# Altium PCB A13-OLinuXino-MICRO_Rev_B_saved.PcbDoc (part 4 of 4)
Units mil, origin at the board's own origin, x right, y up, seen from the top; angles counter-clockwise.
Board outline 3950 x 3350 mil, 4 copper layers (Top, Route2, Route15, Bottom), stack 64.567 mil thick; 262 components, 264 nets, 1099 pads, 476 vias.
Unrouted connection lines stored in the file: 19.
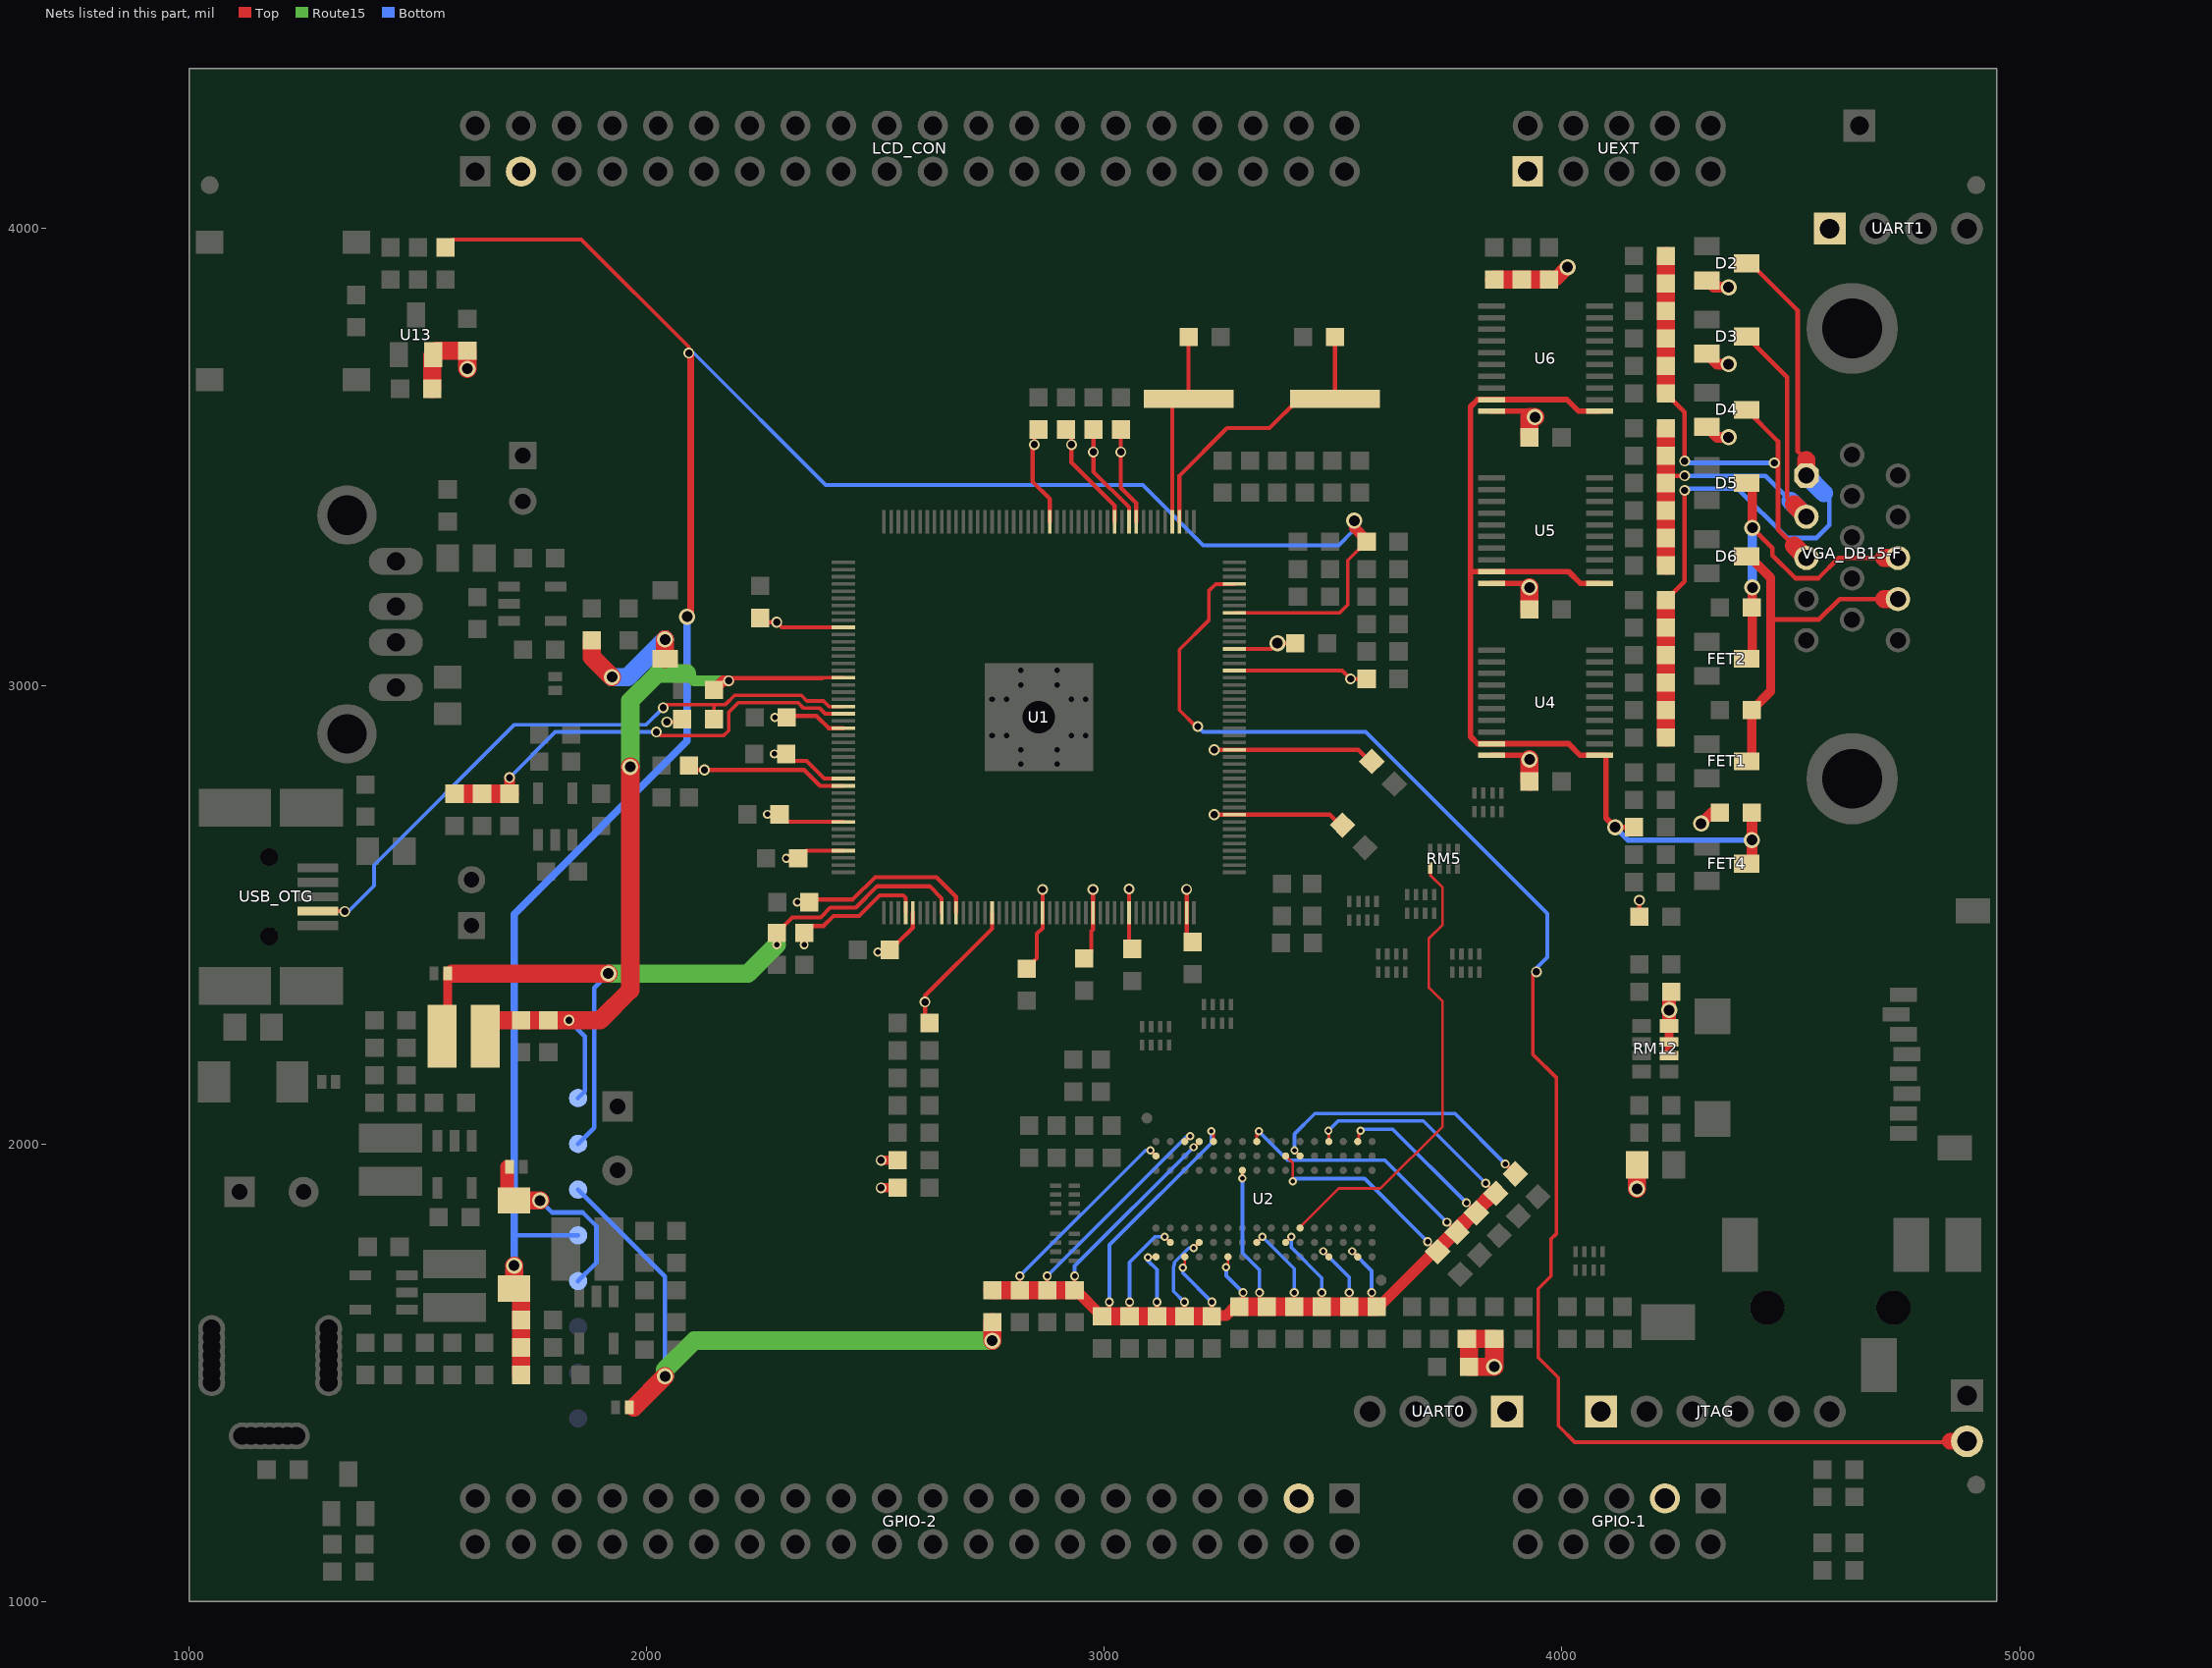
[diagram p6: the nets of this part, all layers, seen from the top]

## Via types
v1: diameter 23.75/23.75/23.75/23.75 (per signal layer), hole 15.75, Top to Bottom, 263 vias
v2: diameter 35.43/31.62/31.62/35.43 (per signal layer), hole 23.62, Top to Bottom, 120 vias
v3: diameter 19.81/19.81/19.81/19.81 (per signal layer), hole 11.81, Top to Bottom, 48 vias
v4: diameter 18/18/18/18 (per signal layer), hole 10, Top to Bottom, 41 vias
v5: diameter 169.92/137.92/137.92/169.92 (per signal layer), hole 129.92, Top to Bottom, 4 vias

## Nets (pads, with @x,y where several pads share a name; then routed paths per layer and width w, separated by ;. In a path a pad name is that pad's centre, name@x,y a point inside that pad or via, vN(x,y) a via of type N, cw(c..) or ccw(c..) an arc to the next point about the centre after c; other vN are vias at no path point) (continued)
USB0-IDDET: R2.2 U1.153 USB_OTG.ID | length 1412.5
  Top w8: USB_OTG.ID@1281.54,2508.5 1339.5,2508.5 v1(1340,2508) ; v1(2036,2953) 2043,2960 2147,2960 ; R2.2@2147,2928 2147,2960 ; U1.153@2429.83,2955.62 2398.38,2955.62 2386,2968 2349.7,2968 2337.7,2980 2192,2980 2172,2960 2147,2960
  Bottom w8: v1(1340,2508) 1348,2508 1404,2564 1404,2609 1711,2916 1999,2916 v1(2036,2953)
USB0-VBUSDET: C87.1 R57.1 R58.2 U1.154 | length 992.8
  Top w8: v1(2021,2900) 2029,2892 2168,2892 2179,2903 2179,2943 2200,2964 2331,2964 2343,2952 2378,2952 2390.13,2939.87 U1.154@2429.83,2939.87
  Top w24: R57.1@1700,2765 v1(1700,2800)
  Top w40: C87.1@1580,2765 R58.2@1640,2765 R57.1@1700,2765
  Bottom w8: v1(1700,2800) 1800,2900 v1(2021,2900)
V+: 1.5V_E.2 C10.2 C11.2 C12.2 C13.2 C14.2 C42.1 C56.1 C61.2 P5.1 R1.1 R7.2 R9.2 U1.23 U1.30 U1.43 U1.53 U1.62 | length 2808.5
  Top w8: C56.1@3792,1574 C56.1@3797,1574
  Top w9: C10.2@2830,2383 2852.5,2405.5 2852.5,2459 2864.87,2471.37 U1.23@2864.87,2504.83 v1(2864.87,2555.87) ; C11.2@2956,2405 2971.5,2420.5 2971.5,2465 2975.11,2468.61 U1.30@2975.11,2504.83 v1(2975.11,2555.89) ; v1(3179.83,2556.17) U1.43@3179.83,2504.83 3179.83,2454.17 C12.2@3193,2441 ; v1(3240,2719.4) U1.53@3284.17,2719.4 3492.6,2719.4 3515.25,2696.75 C13.2@3520.25,2696.75 ; v1(3240,2861.13) U1.62@3284.17,2861.13 3554.87,2861.13 3580.25,2835.75 C14.2@3584.25,2835.75
  Top w20: 1.5V_E.2@1962,1424 1972,1424 ; v1(2512,1904) C42.1@2548,1904 ; v1(2512,1964) R7.2@2548,1964
  Top w40: 1972,1424 v2(2040,1492) ; v2(2755,1570) R1.1@2755,1610 ; C61.2@3797,1513 3797,1574 R9.2@3852,1574 v2(3852,1513) C61.2@3797,1513
  Route15 w40: v2(2040,1492) 2040,1506 2104,1570 v2(2755,1570)
  Bottom w10: P5.1@1850,1900 2040,1710 v2(2040,1492)
VCC: 3.3V_E.2 C1.2 C2.2 C15.2 C16.2 C41.2 C58.2 C84.1 C85.1 C86.1 C95.1 D1.A D2.2 D3.2 D4.2 D7.A GPIO-1.3 GPIO-2.3 JTAG.1 L1.1 LCD_CON.3 P3.1 R2.1 R15.2 R16.2 R47.2 R48.2 R49.2 R50.2 R56.2 R60.1 RM12.1.2 RM12.2.2 RM12.3.2 U1.5 U1.76 U1.97 U1.100 U1.142 U1.163 U4.20 U5.20 U6.20 U13.2 UART0.1 UART1.1 UEXT.1 | length 3089.5
  Top w8: v1(2044,2922) 2071,2922 R2.1@2077,2928 ; v3(2279,2852) C16.2@2305,2852 ; v3(2505,2419) 2526,2419 C1.2@2531,2424 ; U1.76@3284.17,3081.61 3365.61,3081.61 v2(3378,3094)
  Top w9: C2.2@2248,3149 2257,3140 v1(2284,3140) 2295.15,3128.85 U1.142@2429.83,3128.85 ; C16.2@2305,2852 2320,2837 2349,2837 2387.86,2798.14 U1.163@2429.83,2798.14 ; C1.2@2531,2424 2546,2439 2548,2439 2581.41,2472.41 U1.5@2581.41,2504.83 ; C15.2@2916,3561 2928,3549 v1(2928,3528) 2928,3489 3022.35,3394.65 U1.100@3022.35,3359.17 ; C41.2@3036,3561 v1(3036,3512) 3036,3434 3069.6,3400.4 U1.97@3069.6,3359.17 ; v2(3378,3094) C58.2@3417,3094
  Top w10: R56.2@4169,2496 v1(4169,2532)
  Top w12: U4.20@3845.89,2848.84 3920.16,2848.84 v2(3929,2840) ; U5.20@3845.89,3224.84 3920.16,3224.84 v2(3929,3216) ; U6.20@3845.89,3600.84 3928.16,3600.84 v2(3941,3588)
  Top w20: 3.3V_E.2@1695,1950 3.3V_E.2@1700,1950 ; RM12.3.2@4234,2193 RM12.2.2@4234,2223 RM12.1.2@4234,2258
  Top w24: v2(4304,2700) 4328,2724 R16.2@4345,2724 ; D4.2@4316.69,3566.6 4339.29,3544 v2(4364,3544) ; D3.2@4316.69,3726.6 4339.29,3704 v2(4364,3704) ; D2.2@4316.69,3886.6 4331.29,3872 v2(4364,3872)
  Top w30: 3.3V_E.2@1695,1950 1695,1876.26 D7.A@1710,1876.26 ; RM12.1.2@4234,2258 v2(4234,2292) 4234,2327 R15.2@4239,2332
  Top w32: R47.2@3972,3889 3985,3889 v2(4012,3916)
  Top w40: R50.2@1531,3650 1531,3722.29 U13.2@1533.4,3724.69 1541.71,3733 C95.1@1608,3733 v2(1608,3694) ; D7.A@1710,1876.26 v2(1767,1876.26) ; R60.1@1880,3100 1880,3064 v2(1924,3020) ; D1.A@2040,3060.2 v2(2040,3102) ; R49.2@3852,3889 R48.2@3912,3889 R47.2@3972,3889 ; C84.1@3929,2792 v2(3929,2840) ; C85.1@3929,3168 v2(3929,3216) ; C86.1@3929,3544 3929,3588 v2(3941,3588) ; v2(4164,1902) L1.1@4164,1954
  Bottom w10: v2(1767,1876.26) 1793.26,1850 1860,1850 1890,1820 1890,1740 P3.1@1850,1700
  Bottom w40: v2(1924,3020) 1958,3020 v2(2040,3102)
VCC/2: 1.2V_E.2 C3.2 C4.2 C5.2 C6.2 C17.2 C18.2 C19.2 C20.2 L3.1 P6.1 U1.4 U1.9 U1.11 U1.16 U1.156 U1.164 U1.169 U1.173 | length 3625.5
  Top w8: v3(2264,2720) C6.2@2290,2720 ; v3(2284,2435) C17.2@2284,2461 ; v3(2305,2624) C20.2@2331,2624 ; v3(2329,2528) C3.2@2355,2528 ; v3(2344,2435) C4.2@2344,2461
  Top w9: C19.2@2092,2827 2102,2817 v1(2126,2817) 2344,2817 2378.61,2782.39 U1.164@2429.83,2782.39 ; v3(2280,2932) C5.2@2306,2932 2309,2935 2371,2935 2397.62,2908.38 U1.156@2429.83,2908.38 ; C17.2@2284,2461 2318,2495 2380,2495 2401,2516 2457,2516 2504,2563 2618,2563 2644.4,2536.6 U1.9@2644.4,2504.83 ; C6.2@2290,2720 2306.35,2703.65 U1.169@2429.83,2703.65 ; C20.2@2331,2624 2347.66,2640.66 U1.173@2429.83,2640.66 ; C4.2@2344,2461 2359,2476 2386,2476 2408,2498 2464,2498 2509,2543 2560,2543 2565.66,2537.34 U1.4@2565.66,2504.83 ; C3.2@2355,2528 2361,2534 2450,2534 2499,2583 2633,2583 2675.9,2540.1 U1.11@2675.9,2504.83 ; C18.2@2618,2264 2608,2274 v1(2608,2310) 2608,2323.5 2754.64,2470.14 U1.16@2754.64,2504.83
  Top w20: L3.1@1552.76,2235 1565,2247.24 1.2V_E.2@1565,2372 1575,2372
  Top w40: 1575,2372 v2(1916,2372)
  Route15 w40: v2(1916,2372) 2221,2372 v3(2284,2435)
  Bottom w10: P6.1@1850,2000 1885,2035 1885,2341 v2(1916,2372)
VCCINT: C7.2 C8.2 C9.2 C21.2 C22.2 C78.1 C79.1 L3.2 P7.1 U1.35 U1.73 U1.98 U1.109 U1.149 | length 2629.3
  Top w8: 2383.5,3017.5 2384.61,3018.61 U1.149@2429.83,3018.61
  Top w9: C22.2@2856,3561 2847,3552 v1(2847,3528) 2843,3524 2843,3447 2880.62,3409.38 U1.109@2880.62,3359.17 ; C8.2@2976,3561 v1(2976,3512) 2976,3469 3053.85,3391.15 U1.98@3053.85,3359.17 ; v1(3053.85,2556.85) U1.35@3053.85,2504.83 3053.85,2433.15 C7.2@3061,2426 ; U1.73@3284.17,3034.36 3519.64,3034.36 v1(3538,3016) C21.2@3573,3016
  Top w10: v1(2179,3012) 2184.5,3017.5 2383.5,3017.5
  Top w24: C9.2@2147,2992 2167,3012 v1(2179,3012)
  Top w40: L3.2@1647.24,2235 1647.24,2270 C79.1@1725,2270 C78.1@1785,2270 v1(1830,2270) 1898,2270 1964,2336 v2(1964,2824)
  Route15 w24: 2088,3028 2104,3012 v1(2179,3012)
  Route15 w40: v2(1964,2824) 1964,2968 2024,3028 2088,3028
  Bottom w10: v1(1830,2270) 1865,2235 1865,2115 P7.1@1850,2100
VDD.: C24.1 C25.1 C26.1 C27.1 C28.1 C29.1 C30.1 C31.1 C32.1 C44.1 C45.1 C46.1 C47.1 C48.1 C49.1 C50.1 C51.1 C52.1 R1.2 U2.A1 U2.A8 U2.B2 U2.C1 U2.C9 U2.D2 U2.D9 U2.E9 U2.F1 U2.G7 U2.H2 U2.H9 U2.K2 U2.K8 U2.N1 U2.N9 U2.R1 U2.R9 | length 6883.3
  Top w5: v4(3411.82,1918.33) 3411.82,1949.89
  Top w6: v4(3094.92,1751.86) 3096.1,1753.04 U2.A1@3112.61,1753.04 ; v4(3100.4,1985.72) U2.A8@3112.61,1973.51 ; v4(3131.7,1796.94) U2.B2@3144.11,1784.53 ; v4(3171.67,1729.02) 3175.6,1732.95 U2.C1@3175.6,1753.04 ; U2.C9@3175.6,2005 v4(3187.35,2016.76) ; v4(3194.89,1772.33) U2.D2@3207.1,1784.53 ; v4(3194.89,1992.8) U2.D9@3207.1,2005 ; v4(3233.87,2027.69) 3238.59,2022.97 U2.E9@3238.59,2005 ; v4(3266.15,1730.4) 3270.09,1734.34 U2.F1@3270.09,1753.04 ; v4(3301.58,1924.33) U2.G7@3301.59,1942.01 ; U2.H2@3333.08,1784.53 v4(3345.28,1796.74) ; U2.H9@3333.08,2005 3333.08,2022.56 v4(3337.8,2027.29) ; U2.K2@3396.07,1784.53 v4(3408.28,1796.74) ; U2.K8@3396.07,1973.51 3411.82,1957.76 3411.82,1949.89 ; v4(3478.35,1765.24) U2.N1@3490.56,1753.04 ; v4(3489.38,2028.63) 3490.56,2027.45 U2.N9@3490.56,2005 ; v4(3541.35,1765.24) U2.R1@3553.55,1753.04 ; U2.R9@3553.55,2005 3556,2007.46 3556,2025.44 v4(3559.49,2028.93) ; v3(3706.2,1786.36) C26.1@3728.12,1764.44 ; v3(3748.63,1828.79) C52.1@3770.55,1806.87 ; v3(3791.06,1871.22) C31.1@3812.97,1849.3 ; v3(3833.48,1913.64) C32.1@3855.4,1891.72
  Top w8: C45.1@2815,1680 v3(2815,1711) ; C47.1@2875,1680 v3(2875,1711) ; C25.1@2935,1680 v3(2935,1711) ; C49.1@2995,1623 3011,1639 v3(3011,1654) ; C24.1@3055,1623 v3(3055,1654) ; C44.1@3115,1623 v3(3115,1654) ; C46.1@3175,1623 v3(3175,1654) ; C48.1@3235,1623 3235,1625 v3(3235,1654) ; C50.1@3295,1644 3303,1652 v3(3303,1675) ; v3(3339,1675) 3339,1660 C27.1@3355,1644 ; C51.1@3415,1644 v3(3415,1675) ; C28.1@3475,1644 v3(3475,1675) ; C29.1@3535,1644 v3(3535,1675) ; v3(3584,1675) 3584,1655 C30.1@3595,1644
  Top w20: C25.1@2935,1680 C25.1@2938,1680
  Top w24: C25.1@2938,1680 C49.1@2995,1623 ; C48.1@3235,1625 3266,1625 3285,1644 C50.1@3295,1644 ; C30.1@3589.94,1644 3600,1644 3720.44,1764.44 C26.1@3728.12,1764.44
  Top w32: C26.1@3728.12,1764.44 3728.12,1770.12 3764.87,1806.87 C52.1@3770.55,1806.87 3770.55,1812.55 3807.3,1849.3 C31.1@3812.97,1849.3 3812.97,1854.97 3849.72,1891.72 C32.1@3855.4,1891.72
  Top w40: R1.2@2755,1680 C45.1@2815,1680 C47.1@2875,1680 C25.1@2935,1680 ; C49.1@2995,1623 C24.1@3055,1623 C44.1@3115,1623 C46.1@3175,1623 C48.1@3235,1623 ; C50.1@3295,1644 C27.1@3355,1644 C51.1@3415,1644 C28.1@3475,1644 C29.1@3535,1644 3589.94,1644 C30.1@3595,1644
  Bottom w8: v3(2815,1711) 3089.72,1985.72 v4(3100.4,1985.72) ; v3(2875,1711) 3180.76,2016.76 v4(3187.35,2016.76) ; v3(2935,1711) 2935,1732.91 v4(3194.89,1992.8) ; v3(3011,1654) 3011,1779 3233.87,2001.87 v4(3233.87,2027.69) ; v3(3055,1654) 3055,1741 3110.94,1796.94 v4(3131.7,1796.94) ; v4(3094.92,1751.86) 3094.92,1745.08 3115,1725 v3(3115,1654) ; v4(3171.67,1729.02) 3171.67,1717.33 v3(3235,1654) ; v3(3175,1654) 3151,1678 3151,1731 3153,1738 3153,1741 3184.33,1772.33 v4(3194.89,1772.33) ; v4(3266.15,1730.4) 3266.15,1711.85 v3(3303,1675) ; v4(3301.58,1924.33) 3301.58,1761.42 3339,1724 v3(3339,1675) ; v4(3337.8,2027.29) 3401.09,1964 3613.42,1964 v3(3748.63,1828.79) ; v4(3345.28,1796.74) 3415,1727.02 v3(3415,1675) ; v4(3408.28,1796.74) 3408.28,1773.72 3475,1707 v3(3475,1675) ; v4(3411.82,1918.33) 3417.49,1924 3568.57,1924 v3(3706.2,1786.36) ; v4(3478.35,1765.24) 3535,1708.6 v3(3535,1675) ; v4(3489.38,2028.63) 3510.75,2050 3697.13,2050 v3(3833.48,1913.64) ; v4(3541.35,1765.24) 3584,1722.59 v3(3584,1675) ; v4(3559.49,2028.93) 3562.56,2032 3630.27,2032 v3(3791.06,1871.22)
VGA_B: D4.3 R20.2 R24.2 R27.2 R30.2 R33.2 R36.2 VGA_DB15-F.3 | length 1048.3
  Top w10: R36.2@4227,3640 4268,3599 v1(4268,3492) ; D4.3@4403.31,3604 4472,3535.31 v1@4472,3488 ; v1(4464,3488) v1@4472,3488 ; 4507,3307.43 4472,3342.43 v1@4472,3488
  Top w40: R36.2@4227,3640 R33.2@4227,3700 R30.2@4227,3760 R27.2@4227,3820 R20.2@4227,3880 R24.2@4227,3940 ; 4507,3307.43 VGA_DB15-F.3@4534,3280.43
  Bottom w10: v1(4268,3492) 4272,3488 v1(4464,3488)
VGA_CTRL: FET4.3 R16.1 R38.2 U4.1 U4.19 U5.1 U5.19 U6.1 U6.19 | length 2288.4
  Top w12: U5.1@4082.11,3224.84 4040.16,3224.84 4014.57,3250.43 U5.19@3845.89,3250.43 3800,3250.43 ; U6.1@4082.11,3600.84 4036.16,3600.84 4010.57,3626.43 U6.19@3845.89,3626.43 3815.43,3626.43 3800,3611 3800,3250.43 ; v2@4128,2692 R38.2@4157,2692 v2(4116,2692) 4096,2712 4096,2848.84 U4.1@4082.11,2848.84 4040.16,2848.84 4014.57,2874.43 U4.19@3845.89,2874.43 3815.57,2874.43 3800,2890 3800,3250.43
  Top w24: FET4.3@4403.31,2612 4415,2623.69 v2(4415,2664) R16.1@4415,2724
  Bottom w12: v2(4116,2692) 4144,2664 v2(4415,2664)
VGA_G: D3.3 R19.2 R23.2 R26.2 R29.2 R32.2 R35.2 VGA_DB15-F.2 | length 1091.8
  Top w10: R26.2@4227,3460 v1(4268,3460) ; D3.3@4403.31,3764 4492,3675.31 4492,3412.43 4507,3397.43
  Top w40: R35.2@4227,3264 R32.2@4227,3324 R29.2@4227,3384 R26.2@4227,3444 4227,3460 R19.2@4227,3504 R23.2@4227,3564 ; 4507,3397.43 VGA_DB15-F.2@4534,3370.43
  Bottom w10: v1(4268,3460) 4444.43,3460 4499.43,3405
  Bottom w40: 4499.43,3405 VGA_DB15-F.2@4534,3370.43
VGA_HSYNC: D5.3 FET2.3 R39.1 VGA_DB15-F.13 | length 794.3
  Top w10: v2(4416,3346) 4460,3302 4460,3286 4510,3236 4560,3236 4604.43,3280.43 4704.43,3280.43
  Top w20: FET2.3@4403.31,3060 4416,3060 R39.1@4416,3172 ; D5.3@4403.31,3444 4416,3431.31 v2(4416,3346) ; R39.1@4415,3172 R39.1@4416,3172 ; v2(4416,3216) R39.1@4416,3172
  Top w40: 4704.43,3280.43 VGA_DB15-F.13@4734,3280.43
  Bottom w20: v2(4416,3216) v2(4416,3346)
VGA_R: D2.3 R18.2 R22.2 R25.2 R28.2 R31.2 R34.2 VGA_DB15-F.1 | length 1582.9
  Top w10: R22.2@4227,3188 4268,3229 v1(4268,3428) ; D2.3@4403.31,3924 4412,3924 4515,3821 4515,3513 4534,3494
  Top w40: R34.2@4227,2888 R31.2@4227,2948 R28.2@4227,3008 R25.2@4227,3068 R18.2@4227,3128 R22.2@4227,3188 ; VGA_DB15-F.1@4534,3460.43 4534,3494
  Bottom w10: v1(4268,3428) 4272,3432 4384,3432 4492,3324 4556,3324 4584,3352 4584,3410.43 4572,3422.43
  Bottom w40: VGA_DB15-F.1@4534,3460.43 4572,3422.43
VGA_VSYNC: D6.3 FET1.3 R40.1 VGA_DB15-F.14 | length 791.4
  Top w10: 4456,3146 4562,3146 4606.43,3190.43 4704.43,3190.43
  Top w20: FET1.3@4403.31,2836 4415,2847.69 R40.1@4415,2948 4456,2989 4456,3146 4456,3237 4409,3284 D6.3@4403.31,3284
  Top w40: 4704.43,3190.43 VGA_DB15-F.14@4734,3190.43
VMIC: MIC.2 U1.85 | length 3434.7
  Top w8: v1(3204,2912) 3200,2912 3164,2948 3164,3080 3228,3144 3228,3208 3243.34,3223.34 U1.85@3284.17,3223.34 ; v1(3944,2376) 3936,2368 3936,2196 3988,2144 3988,1804 3976,1792 3976,1711 3948,1683 3948,1533 3992,1489 3992,1384 4028,1348 4846,1348 4848,1350
  Top w36: 4848,1350 MIC.2@4885,1350
  Bottom w8: v1(3204,2912) 3216,2900 3571,2900 3968,2503 3968,2408 3944,2384 v1(3944,2376)
VPP: C23.2 C93.1 C94.1 D7.K P4.1 R44.1 R53.1 U1.81 | length 5319.5
  Top w8: R53.1@1560,3959 1577,3976 1857,3976 2092,3741 v1(2092,3728) ; U1.81@3284.17,3160.35 3514.35,3160.35 3532,3178 3532,3275 C23.2@3573,3316
  Top w16: v2(2088,3152) 2096,3160 2096,3724 v1(2092,3728)
  Top w24: v2(3546,3362) 3546,3346 3573,3319 C23.2@3573,3316
  Top w40: v2(1710,1734) D7.K@1710,1683.74 1725,1668.74 R44.1@1725,1615 C94.1@1725,1555 C93.1@1725,1495
  Bottom w8: v1(2092,3728) 2103,3728 2391,3440 2399,3440 2400,3440 3084,3440 3216,3308 3512,3308 3546,3342 v2(3546,3362)
  Bottom w10: 1710,1800 P4.1@1850,1800
  Bottom w16: v2(1710,1734) 1710,1800 1710,2502 2088,2880 v2(2088,3152)
WEN: RM5.4.2 U2.L3 | length 1005.2
  Top w6: U2.L3@3427.57,1816.03 3427.57,1818.07 3511.9,1902.4 3603.4,1902.4 3739,2038 3739,2311 3709,2341 3709,2449 3739,2479 3739,2560 3712.47,2586.53 RM5.4.2@3712.47,2602.82
XTALI: C33.2 Q1.2 U1.92 | length 439.5
  Top w9: U1.92@3148.34,3359.17 3148.34,3628 Q1.2@3184,3628 C33.2@3184,3763
XTALO: C34.2 Q1.1 U1.91 | length 645.4
  Top w9: U1.91@3164.09,3359.17 3164.09,3460.09 3268,3564 3361,3564 3425,3628 Q1.1@3504,3628 C34.2@3504,3763
ZQ: R11.2 U2.L8 | length 608.5
  Top w6: v4(3415.36,1985.72) U2.L8@3427.57,1973.51
  Top w8: v3(3875.91,1956.07) R11.2@3897.83,1934.15
  Bottom w8: v4(3415.36,1985.72) 3415.36,2021.36 3460,2066 3765.98,2066 v3(3875.91,1956.07)
pads on no net: GPIO-1.7 GPIO-1.8 GPIO-1.9 GPIO-1.10 HEADPHONES.1 HEADPHONES.4 PWR.+1 PWR.+2 PWR.+3 PWR.+4 PWR.+5 PWR.+6 PWR.-1 PWR.-2 PWR.-3 PWR.-4 PWR.-5 PWR.-6 PWR.--1 PWR.--2 PWR.--3 PWR.--4 PWR.--5 PWR.--6 RM9.3.2 RM16.4.1 RM16.4.2 SD.9 SD.11 U1.99 U2.FID1 U2.FID2 U2.J1 U2.J9 U2.L1 U2.L9 U2.M7 U2.T7 U4.16 U4.18 U5.16 U5.18 U6.16 U6.18 U$1.1 U$2.1 U$3.1 USB_OTG.1 VGA_DB15-F.4 VGA_DB15-F.9 VGA_DB15-F.11 VGA_DB15-F.12 VGA_DB15-F.15
copper on no net: | length 2846.3
  Top w6: 2707,2308 cw(c2717,2308) 2717,2318 ccw(c2717,2324) 2723,2324 ccw(c2717,2324) 2717,2330 ; 2713,2330 cw(c2713,2336) 2707,2336 cw(c2713,2336) 2713,2342 ; 2719,2275 cw(c2726,2275) 2726,2282 ; 2725,2294 cw(c2725,2300) 2719,2300 cw(c2725,2300) 2725,2306 ; 2727,2282 ccw(c2727,2288) 2733,2288 ccw(c2727,2288) 2727,2294 ; 2729,2354 cw(c2729,2360) 2723,2360 cw(c2729,2360) 2729,2366 ; 2731,2342 ccw(c2731,2348) 2737,2348 ccw(c2731,2348) 2731,2354 ; 2741,2318 cw(c2741,2324) 2735,2324 cw(c2741,2324) 2741,2330 ; 2746,2384 ccw(c2752,2384) 2752,2378 cw(c2752,2372) 2758,2372 cw(c2752,2372) 2752,2366 ; 2750,2306 ccw(c2750,2312) 2756,2312 ccw(c2750,2312) 2750,2318 ; 2755,2330 ccw(c2755,2336) 2761,2336 ccw(c2755,2336) 2755,2342 cw(c2755,2348) 2749,2348 cw(c2755,2348) 2755,2354 ; 2763,2354 ccw(c2763,2361) 2770,2361 ; 2773,2336 cw(c2779,2336) 2779,2342 ; 2782,2384 ccw(c2788,2384) 2788,2378 ; 2788,2354 cw(c2788,2360) 2782,2360 cw(c2788,2360) 2788,2366 ; 2795,2342 ccw(c2795,2348) 2801,2348 ccw(c2795,2348) 2795,2354 ; 2795,2366 ccw(c2795,2372) 2801,2372 ccw(c2795,2372) 2795,2378 ; 2859,1825 ccw(c2865,1825) 2865,1819 ; 2859,1828 cw(c2865,1828) 2865,1834 ; 2917,1819 ccw(c2917,1825) 2923,1825 ; 2923,1828 cw(c2929,1828) 2929,1834 ; 2932,1834 cw(c2932,1828) 2938,1828 ; 2938,1825 ccw(c2944,1825) 2944,1819 ; 2947,1819 ccw(c2947,1825) 2953,1825 ; 2953,1828 cw(c2959,1828) 2959,1834 ; 2962,1834 cw(c2962,1828) 2968,1828 ; 2986,1735 ccw(c2992,1735) 2992,1729 ; 2986,1803 ccw(c2992,1803) 2992,1797 ccw(c2992,1803) 2998,1803 ; 2992,1771 cw(c2992,1765) 2998,1765 ccw(c3004,1765) 3004,1759 ; 2995,1729 ccw(c2995,1735) 3001,1735 ; 2998,1822 cw(c3004,1822) 3004,1828 cw(c3004,1822) 3010,1822 ; 3001,1741 cw(c3007,1741) 3007,1747 ; 3007,1759 ccw(c3007,1765) 3013,1765 cw(c3019,1765) 3019,1771 ; 3010,1747 cw(c3010,1741) 3016,1741 ; 3010,1801 ccw(c3016,1801) 3016,1795 ccw(c3016,1801) 3022,1801 ; 3010,1852 ccw(c3010,1858) 3016,1858 ; 3016,1705 ccw(c3022,1705) 3022,1699 ; 3016,1871 cw(c3022,1871) 3022,1877 cw(c3022,1871) 3028,1871 ; 3022,1771 cw(c3022,1765) 3028,1765 ; 3022,1822 cw(c3028,1822) 3028,1828 cw(c3028,1822) 3034,1822 ; 3028,1717 ccw(c3034,1717) 3034,1711 ; 3028,1858 ccw(c3034,1858) 3034,1852 ccw(c3034,1858) 3040,1858 ; 3034,1798 ccw(c3040,1798) 3040,1792 ccw(c3040,1798) 3046,1798 ; 3037,1711 ccw(c3037,1717) 3043,1717 ; 3040,1867 cw(c3046,1867) 3046,1873 cw(c3046,1867) 3052,1867 ; 3043,1748 cw(c3049,1748) 3049,1754 ; 3046,1822 cw(c3052,1822) 3052,1828 cw(c3052,1822) 3058,1822 ; 3052,1754 cw(c3052,1748) 3058,1748 ; 3052,1858 ccw(c3058,1858) 3058,1852 ; 3058,1717 ccw(c3064,1717) 3064,1711 ; 3058,1784 ccw(c3064,1784) 3064,1778 ccw(c3064,1784) 3070,1784 ; 3064,1840 cw(c3064,1834) 3070,1834 ccw(c3076,1834) 3076,1828 ccw(c3076,1834) 3082,1834 cw(c3088,1834) 3088,1840 cw(c3088,1834) 3094,1834 ; 3070,1809 cw(c3076,1809) 3076,1815 cw(c3076,1809) 3082,1809 ; 3079,2272 cw(c3085,2272) 3085,2278 ccw(c3085,2284) 3091,2284 ccw(c3085,2284) 3085,2290 ; 3079,2290 cw(c3079,2296) 3073,2296 cw(c3079,2296) 3079,2302 ; 3079,2314 cw(c3079,2320) 3073,2320 cw(c3079,2320) 3079,2326 ; 3085,2302 ccw(c3085,2308) 3091,2308 ccw(c3085,2308) 3085,2314 ; 3085,2326 ccw(c3085,2332) 3091,2332 ; 3094,1723 ccw(c3094,1729) 3100,1729 cw(c3106,1729) 3106,1735 ; 3109,1735 cw(c3109,1729) 3115,1729 ; 3115,1728 ccw(c3120,1728) 3120,1723 ; 3166,2146 cw(c3172,2146) 3172,2152 cw(c3172,2146) 3178,2146 ; 3175,2176 ccw(c3175,2182) 3181,2182 ; 3178,1900 ccw(c3178,1906) 3184,1906 ; 3178,2080 ccw(c3184,2080) 3184,2074 ccw(c3184,2080) 3190,2080 ; 3181,2217 cw(c3187,2217) 3187,2223 cw(c3187,2217) 3193,2217 ; 3184,1918 cw(c3190,1918) 3190,1924 cw(c3190,1918) 3196,1918 ; 3190,2146 cw(c3196,2146) 3196,2152 cw(c3196,2146) 3202,2146 ; 3193,2182 ccw(c3199,2182) 3199,2176 ccw(c3199,2182) 3205,2182 ; 3196,1909 ccw(c3202,1909) 3202,1903 ccw(c3202,1909) 3208,1909 ; 3202,2101 ccw(c3208,2101) 3208,2095 ccw(c3208,2101) 3214,2101 ; 3205,2193.5 cw(c3211,2193.5) 3211,2199.5 cw(c3211,2193.5) 3217,2193.5 ; 3208,1918 cw(c3214,1918) 3214,1924 cw(c3214,1918) 3220,1918 ; 3214,2146 cw(c3220,2146) 3220,2152 cw(c3220,2146) 3226,2146 ; 3217,2182 ccw(c3223,2182) 3223,2176 ; 3220,1909 ccw(c3226,1909) 3226,1903 ccw(c3226,1909) 3232,1909 ; 3226,2107 ccw(c3232,2107) 3232,2101 ccw(c3232,2107) 3238,2107 ; 3229,2419 cw(c3229,2425) 3223,2425 cw(c3229,2425) 3229,2431 ; 3229,2443 cw(c3229,2449) 3223,2449 cw(c3229,2449) 3229,2455 ; 3229,2467 cw(c3229,2473) 3223,2473 cw(c3229,2473) 3229,2479 ; 3229.3,2395 cw(c3229.3,2401) 3223.3,2401 cw(c3229.3,2401) 3229.3,2407 ; 3232,1915 cw(c3238,1915) 3238,1921 cw(c3238,1915) 3244,1915 ; 3238,2146 cw(c3244,2146) 3244,2152 cw(c3244,2146) 3250,2146 ; 3241,2395 cw(c3241,2389) 3247,2389 ; 3241,2407 ccw(c3241,2413) 3247,2413 ccw(c3241,2413) 3241,2419 ; 3241,2431 ccw(c3241,2437) 3247,2437 ccw(c3241,2437) 3241,2443 ; 3244,1909 ccw(c3250,1909) 3250,1903 ; 3250,2113.5 ccw(c3256,2113.5) 3256,2107.5 ccw(c3256,2113.5) 3262,2113.5 ; 3260,2455 ccw(c3260,2461) 3266,2461 ccw(c3260,2461) 3260,2467 ; 3260,2479 ccw(c3260,2485) 3266,2485 ccw(c3260,2485) 3260,2491 ; 3262,2146 cw(c3268,2146) 3268,2152 cw(c3268,2146) 3274,2146 ; 3271,2425 cw(c3277,2425) 3277,2431 cw(c3277,2425) 3283,2425 ; 3274,2119 cw(c3280,2119) 3280,2125 cw(c3280,2119) 3286,2119 ; 3274,2143.5 ccw(c3280,2143.5) 3280,2137.5 ccw(c3280,2143.5) 3286,2143.5 ; 3274.5,1903 ccw(c3274.5,1909) 3280.5,1909 ; 3274.5,1924 cw(c3274.5,1918) 3280.5,1918 ; 3279,2164 cw(c3279.01,2157.01) 3286,2157 ; 3283,2390.6 cw(c3289,2390.6) 3289,2396.6 cw(c3289,2390.6) 3295,2390.6 ; 3283,2414.6 ccw(c3289,2414.6) 3289,2408.6 ccw(c3289,2414.6) 3295,2414.6 ; 3286,2117.5 ccw(c3292,2117.5) 3292,2111.5 ccw(c3292,2117.5) 3298,2117.5 ; 3295,2374 ccw(c3301,2374) 3301,2368 ccw(c3301,2374) 3307,2374 ; 3295,2425 cw(c3301,2425) 3301,2431 cw(c3301,2425) 3307,2425 ; 3298,2158 cw(c3304,2158) 3304,2164 cw(c3304,2158) 3310,2158 ; 3307,2392 cw(c3313,2392) 3313,2398 cw(c3313,2392) 3319,2392 ; 3307,2416 ccw(c3313,2416) 3313,2410 ccw(c3313,2416) 3319,2416 ; 3310,2128 ccw(c3316,2128) 3316,2122 ccw(c3316,2128) 3322,2128 ; 3319,2357.5 ccw(c3325,2357.5) 3325,2351.5 ccw(c3325,2357.5) 3331,2357.5 ; 3319,2425 cw(c3325,2425) 3325,2431 cw(c3325,2425) 3331,2425 ; 3322,2158 cw(c3328,2158) 3328,2164 cw(c3328,2158) 3334,2158 ; 3331,2377 cw(c3337,2377) 3337,2383 cw(c3337,2377) 3343,2377 ; 3331,2401 ccw(c3337,2401) 3337,2395 ; 3334,2128 ccw(c3340,2128) 3340,2122 ccw(c3340,2128) 3346,2128 ; 3343,2362 ccw(c3349,2362) 3349,2356 ccw(c3349,2362) 3355,2362 ; 3346,2158 cw(c3352,2158) 3352,2164 cw(c3352,2158) 3358,2158 ; 3346,2200 cw(c3346,2206) 3340,2206 cw(c3346,2206) 3346,2212 ; 3352,2110 ccw(c3352,2116) 3358,2116 ; 3355,2371 cw(c3361,2371) 3361,2377 cw(c3361,2371) 3367,2371 ; 3358,2121 cw(c3364,2121) 3364,2127 ; 3358,2145.4 ccw(c3364,2145.4) 3364,2139.4 ccw(c3364,2145.4) 3370,2145.4 ; 3358,2224 cw(c3358,2230) 3352,2230 cw(c3358,2230) 3358,2236 ; 3358,2248 cw(c3358,2254) 3352,2254 cw(c3358,2254) 3358,2260 ; 3358,2272 cw(c3358,2278) 3352,2278 cw(c3358,2278) 3358,2284 ; 3362.5,2296 cw(c3362.5,2302) 3356.5,2302 cw(c3362.5,2302) 3362.5,2308 ; 3364,2176 cw(c3364,2170) 3370,2170 ; 3364,2188 ccw(c3364,2194) 3370,2194 ccw(c3364,2194) 3364,2200 ; 3364,2212 ccw(c3364,2218) 3370,2218 ccw(c3364,2218) 3364,2224 ; 3364,2236 ccw(c3364,2242) 3370,2242 ccw(c3364,2242) 3364,2248 ; 3364,2260 ccw(c3364,2266) 3370,2266 ccw(c3364,2266) 3364,2272 ; 3364,2284 ccw(c3364,2290) 3370,2290 ccw(c3364,2290) 3364,2296 ; 3367,2362 ccw(c3373,2362) 3373,2356 ; 3376,2308 cw(c3376,2302) 3382,2302 ; 3394,2170 cw(c3400,2170) 3400,2176 ; 3394,2266 ccw(c3400,2266) 3400,2260 ; 3400,2188 cw(c3400,2194) 3394,2194 cw(c3400,2194) 3400,2200 ; 3400,2212 cw(c3400,2218) 3394,2218 cw(c3400,2218) 3400,2224 ; 3400,2236 cw(c3400,2242) 3394,2242 cw(c3400,2242) 3400,2248 ; 3406,2134 cw(c3412,2134) 3412,2140 ; 3411.5,2284 ccw(c3411.5,2278.5) 3406,2278.5 ccw(c3412.5,2278.5) 3412.5,2272 ; 3412,2152 cw(c3412,2158) 3406,2158 cw(c3412,2158) 3412,2164 ; 3412,2296 cw(c3412,2302) 3406,2302 cw(c3412,2302) 3412,2308 ; 3412,2320 cw(c3412,2326) 3406,2326 cw(c3412,2326) 3412,2332 ; 3415,2176 ccw(c3415,2182) 3421,2182 ccw(c3415,2182) 3415,2188 ; 3415,2200 ccw(c3415,2206) 3421,2206 ccw(c3415,2206) 3415,2212 ; 3415,2224 ccw(c3415,2230) 3421,2230 ccw(c3415,2230) 3415,2236 ; 3415,2248 ccw(c3415,2254) 3421,2254 ccw(c3415,2254) 3415,2260 ; 3416.5,2140 ccw(c3416.5,2146) 3422.5,2146 ccw(c3416.5,2146) 3416.5,2152 ; 3427,2164 ccw(c3427,2170) 3433,2170 ; 3427,2272 cw(c3427,2266) 3433,2266 ; 3429.5,2332 ccw(c3429.5,2338) 3435.5,2338 ccw(c3429.5,2338) 3429.5,2344 ; 3433,2284 ccw(c3433,2290) 3439,2290 ccw(c3433,2290) 3433,2296 ; 3433,2308 ccw(c3433,2314) 3439,2314 ccw(c3433,2314) 3433,2320 ; 3472,2081.5 cw(c3478,2081.5) 3478,2087.5 cw(c3478,2081.5) 3484,2081.5 ; 3484,2080.5 ccw(c3490,2080.5) 3490,2074.5 ccw(c3490,2080.5) 3496,2080.5 ; 3496,2089 cw(c3502,2089) 3502,2095 cw(c3502,2089) 3508,2089 ccw(c3514,2089) 3514,2083 ccw(c3514,2089) 3520,2089 cw(c3526,2089) 3526,2095 ; 3496,2590 ccw(c3502,2590) 3502,2584 cw(c3502,2578) 3508,2578 cw(c3502,2578) 3502,2572 ccw(c3502,2566) 3496,2566 ccw(c3502,2566) 3502,2560 cw(c3502,2554) 3508,2554 cw(c3502,2554) 3502,2548 ccw(c3502,2542) 3496,2542 ccw(c3502,2542) 3502,2536 cw(c3502,2530) 3508,2530 cw(c3502,2530) 3502,2524 ccw(c3502,2518) 3496,2518 ccw(c3502,2518) 3502,2512 cw(c3502,2506) 3508,2506 cw(c3502,2506) 3502,2500 ccw(c3502,2494) 3496,2494 ccw(c3502,2494) 3502,2488 cw(c3502,2482) 3508,2482 cw(c3502,2482) 3502,2476 ccw(c3502,2470) 3496,2470 ccw(c3502,2470) 3502,2464 ; 3505,2416 cw(c3505,2422) 3499,2422 cw(c3505,2422) 3505,2428 ; 3505,2440 cw(c3505,2446) 3499,2446 cw(c3505,2446) 3505,2452 ; 3514,2464 ccw(c3514,2470) 3520,2470 ; 3520,2551 cw(c3526,2551) 3526,2557 ; 3541,2416 cw(c3541,2410) 3547,2410 ; 3541,2428 ccw(c3541,2434) 3547,2434 ccw(c3541,2434) 3541,2440

## Polygon pours and split planes (outlines as drawn)
GND on Route2 "Route2-GND" (solid, remove dead copper, pour order 0): 695,695 5305,695 5305,4705 695,4705
GND on Top "Top-GND" (solid, remove dead copper, pour order 2): 895,4505 895,895 5105,895 5105,4505
GND on Bottom "Bottom-GND" (solid, remove dead copper, pour order 4): 795,795 5205,795 5205,4605 795,4605
VCC on Route15 "Route15-VCC" (solid, remove dead copper, pour order 6): 595,595 5405,595 5405,4805 595,4805
V+ on Route15 "Route15-V+" (solid, remove dead copper, pour order 8): 3096,2943.09 3096,2532.07 3081.93,2518 3028.07,2518 3014,2532.07 3014,2747.07 3002.07,2759 2791,2759 2791,2431.08 2530,2171.08 2530,2032.07 2479.25,1981.32 2479.25,1848.32 2517.62,1809.96 2679.03,1809.96 2703.66,1785.33 2703.66,1505.8 2724.47,1485 3867.07,1485 3920,1537.93 3920,2737.07 3673.07,2984 3362.07,2984 3312.07,3034 3187.95,3034
VCC/2 on Route15 "Route15-VCC/2" (solid, remove dead copper, pour order 10): 2779,2757.07 2566.07,2970 2255,2970 2255,2917.93 2300,2872.93 2300,2842.07 2287.93,2830 2082.93,2830 2070,2817.07 2070,2767.93 2082.93,2755 2212.93,2755 2245,2722.93 2245,2422.93 2267.93,2400 2367.07,2400 2402.07,2435 2517.93,2435 2540,2412.93 2540,2302.93 2562.93,2280 2621.08,2280 2779,2438.94
VCCINT on Route15 "Route15-VCCINT" (solid, remove dead copper, pour order 12): 2085,3071.07 2085,3008.93 2111.93,2982 2571.93,2982 2782.93,2771 3007.93,2771 3026,2752.93 3026,2538.93 3034.93,2530 3076.07,2530 3084,2537.93 3084,2947.93 3182.07,3046 3313.93,3046 3363.93,2996 3558.07,2996 3570,3007.93 3570,3025.07 3558.07,3037 3402.07,3037 3005,3434.07 3005,3527.07 2987.07,3545 2961.93,3545 2947,3530.07 2947,3498.07 2938.93,3490 2917.07,3490 2862.07,3545 2827.93,3545 2381.93,3099 2112.93,3099

## Keep-outs
Keep-Out Layer:
  the board outline again, w10
Top (Mech8):
  lines w8: 1212,2564 1212,2520 1224,2508 1232,2508 ; 1356,2508 1364,2508 1376,2520 1376,2588 ; 1396,3020 1372,3044 1372,3224 1396,3248 ; 1436,3032 1468,3032 ; 1484,3776 1508,3776 ; 1504,3248 1536,3216 1536,3056 1524,3044 ; 3024,3312 3080,3256 3080,3224 3096,3208 3156,3208 ; 3076,3412 3136,3412 ; 3172,3252 3172,3328 ; 3212,2512 3268,2512 3288,2492 3288,2472 3300,2460 3336,2460 3348,2472 3348,2552 3320,2580 ; 4270,2532 4832,2532 4852,2552 4930,2552 ; 4312,1990 4312,1972 4320,1964 4800,1964 4812,1952 4936,1952 ; 4688,2088 4672,2104 4672,2124 4688,2140 ; 4792,2100 4792,2120
Bottom (Mech9):
  lines w8: 1324,2508 1320,2508 1304,2524 1304,2592 1320,2608 1320,2644 1764,3088 1764,3100 1548,3100 1536,3088 1536,3056 1503,3023 ; 1396,3020 1368,3048 1368,3220 1396,3248 ; 1403,2623 2052,3272 2228,3272 ; 1436,3032 1468,3032 ; 1504,3248 1536,3216 1536,3184 1548,3172 1780,3172 1996,3388 2452,3388 ; 2268,3272 2972,3272 3024,3220 3172,3220 3180,3228 3180,3232 ; 2516,3388 3068,3388 3180,3276 3180,3264

## Silkscreen, mask and mechanical layers (free items; w line width, h text height)
Top Overlay:
  lines w8: 1857.17,2660.49 1879.8,2637.86 ; 3608,3580 3608,3352 ; 3716,3836 3716,2984 ; 4124,2528 4124,2518 4107.51,2501.52 ; 1879.8,2637.86 1871.31,2652 1865.65,2646.35 1879.8,2637.86 ; 3608,3352 3612,3368 3604,3368 3608,3352 ; 3716,2984 3720,3000 3712,3000 3716,2984 ; 4107.51,2501.52 4121.65,2510 4116,2515.66 4107.51,2501.52
  text "A13-OLinuXino-MICRO" at 2350,3905 h64.6
  text "Rev.B" at 2350,3840 h47.6
  text "+" at 1604,3329 h42.5
  text "FET" at 4396,3092 h20.4
  text "2" at 4404,3008 h20.4
  text "A" at 3701,2932 h34
  text "FET" at 4396,2860 h20.4
  text "1" at 4412,2776 h20.4
  text "VGA" at 4561.36,2638.01 h34
  text "+" at 1522,2624 h42.5
  text "A" at 4076,2464 h34
  text "+" at 2058,1866 h42.5
  text "+" at 1281,1731 h42.5
  text "5VDC Only!!!" at 1082.93,1376 h34 r60
  text "5VDC" at 1012,1293 h30.6
  text "Only" at 1012,1250 h30.6
Bottom Overlay:
  text "2" at 1640,4265 h34
  text "4" at 1740,4265 h34
  text "6" at 1840,4265 h34
  text "8" at 1940,4265 h34
  text "10" at 2060,4265 h34
  text "12" at 2160,4265 h34
  text "14" at 2260,4265 h34
  text "16" at 2355,4265 h34
  text "18" at 2460,4265 h34
  text "20" at 2560,4265 h34
  text "22" at 2660,4265 h34
  text "24" at 2760,4265 h34
  text "26" at 2860,4265 h34
  text "28" at 2960,4265 h34
  text "30" at 3060,4265 h34
  text "32" at 3160,4265 h34
  text "34" at 3260,4265 h34
  text "36" at 3360,4265 h34
  text "38" at 3460,4265 h34
  text "40" at 3560,4265 h34
  text "2" at 3940,4265 h34
  text "4" at 4040,4265 h34
  text "6" at 4140,4265 h34
  text "8" at 4240,4265 h34
  text "10" at 4360,4265 h34
  text "1" at 1616.33,4051.01 h34
  text "3" at 1727.66,4051.01 h34
  text "5" at 1827.66,4051.01 h34
  text "7" at 1927.66,4051.01 h34
  text "9" at 2027.66,4051.01 h34
  text "11" at 2124.65,4051.01 h34
  text "13" at 2235.98,4051.01 h34
  text "15" at 2335.98,4051.01 h34
  text "17" at 2435.98,4051.01 h34
  text "19" at 2535.98,4051.01 h34
  text "21" at 2630.32,4051.01 h34
  text "23" at 2741.65,4051.01 h34
  text "25" at 2841.65,4051.01 h34
  text "27" at 2941.65,4051.01 h34
  text "29" at 3041.65,4051.01 h34
  text "31" at 3130.32,4051.01 h34
  text "33" at 3241.65,4051.01 h34
  text "35" at 3341.65,4051.01 h34
  text "37" at 3441.65,4051.01 h34
  text "39" at 3541.65,4051.01 h34
  text "1" at 3916.33,4051.01 h34
  text "3" at 4027.66,4051.01 h34
  text "5" at 4127.66,4051.01 h34
  text "7" at 4227.66,4051.01 h34
  text "9" at 4327.66,4051.01 h34
  text "3.3V" at 4646.96,3926.01 h34
  text "GND" at 4918.64,3926.01 h34
  text "UART1-TX" at 4794.02,3726.24 h34 r300
  text "UART1-RX" at 4890.02,3726.24 h34 r300
  text "Made in Bulgaria, 2012" at 3925,3615 h85
  text "6" at 4572.81,3601.87 h27.2 r270
  text "1" at 4472.81,3565.94 h27.2 r270
  text "11" at 4672.81,3558.28 h27.2 r270
  text "7" at 4572.81,3511.87 h27.2 r270
  text "2" at 4472.81,3466.87 h27.2 r270
  text "12" at 4672.81,3459.21 h27.2 r270
  text "8" at 4572.81,3421.87 h27.2 r270
  text "3" at 4472.81,3376.87 h27.2 r270
  text "13" at 4672.81,3369.21 h27.2 r270
  text "9" at 4572.81,3331.87 h27.2 r270
  text "Designed by:" at 3925,3325 h85
  text "4" at 4472.81,3286.87 h27.2 r270
  text "14" at 4672.81,3279.21 h27.2 r270
  text "10" at 4572.81,3239.21 h27.2 r270
  text "VGA" at 4775,3239 h34 r270
  text "5" at 4472.81,3196.87 h27.2 r270
  text "15" at 4672.81,3189.21 h27.2 r270
  text "1.2V_INT" at 1815,2080 h30.6
  text "1.2V_CPU" at 1815,1980 h30.6
  text "1.5V" at 1815,1880 h30.6
  text "3.0VA" at 1815,1780 h30.6
  text "3.3V" at 1815,1680 h30.6
  text "5VDC Only!!!" at 1370,1656 h34
  text "+5V_OTG_PWR" at 1815,1580 h30.6
  text "+" at 1408,1504 h108.5
  text "+5V" at 1815,1480 h34
  text "GND" at 3560,1460 h34 r270
  text "SDC0_DATA3/UART0-RX" at 3660,1460 h34 r270
  text "SDC0_SCK/UART0-TX" at 3760,1460 h34 r270
  text "3.3V" at 3860,1460 h34 r270
  text "3.3V" at 4065,1460 h34 r270
  text "TDI" at 4165,1460 h34 r270
  text "TMS" at 4265,1460 h34 r270
  text "TCK" at 4365,1460 h34 r270
  text "TDO" at 4465,1460 h34 r270
  text "GND" at 4565,1460 h34 r270
  text "MICIN1" at 4845,1400 h27.2
  text "GND" at 1815,1380 h34
  text "UART1" at 3930,1375 h34 r270
  text "JTAG" at 4635,1375 h34 r270
  text "VMIC" at 4845,1300 h27.2
  text "39" at 1660,1265 h34
  text "37" at 1760,1265 h34
  text "35" at 1860,1265 h34
  text "33" at 1960,1265 h34
  text "31" at 2060,1265 h34
  text "29" at 2160,1265 h34
  text "27" at 2260,1265 h34
  text "25" at 2360,1265 h34
  text "23" at 2460,1265 h34
  text "21" at 2560,1265 h34
  text "19" at 2660,1265 h34
  text "7" at 3240,1265 h34
  text "5" at 3340,1265 h34
  text "3" at 3440,1265 h34
  text "1" at 3540,1265 h34
  text "9" at 3940,1265 h34
  text "7" at 4040,1265 h34
  text "5" at 4140,1265 h34
  text "3" at 4240,1265 h34
  text "1" at 4340,1265 h34
  text "9" at 3140,1263 h34
  text "17" at 2760,1262 h34
  text "15" at 2860,1262 h34
  text "13" at 2960,1262 h34
  text "11" at 3060,1262 h34
  text "-" at 1200,1260 h108.5
  text "40" at 1646.65,1051.01 h34
  text "38" at 1746.65,1051.01 h34
  text "36" at 1846.65,1051.01 h34
  text "34" at 1946.65,1051.01 h34
  text "32" at 2046.65,1051.01 h34
  text "30" at 2146.65,1051.01 h34
  text "28" at 2246.65,1051.01 h34
  text "26" at 2346.65,1051.01 h34
  text "24" at 2446.65,1051.01 h34
  text "22" at 2546.65,1051.01 h34
  text "20" at 2646.65,1051.01 h34
  text "18" at 2740.98,1051.01 h34
  text "16" at 2840.98,1051.01 h34
  text "14" at 2940.98,1051.01 h34
  text "12" at 3040.98,1051.01 h34
  text "10" at 3140.98,1051.01 h34
  text "8" at 3227.66,1051.01 h34
  text "6" at 3327.66,1051.01 h34
  text "4" at 3427.66,1051.01 h34
  text "2" at 3527.66,1051.01 h34
  text "10" at 3940.98,1051.01 h34
  text "8" at 4032.66,1051.01 h34
  text "6" at 4132.66,1051.01 h34
  text "4" at 4232.66,1051.01 h34
  text "2" at 4332.66,1051.01 h34
Dimension:
  the board outline again, w10

## Dimensions
4950,1000 to 4950,4350 on Dimension
1000,1000 to 4950,985 on Dimension

## Text inside footprints (layer, text, board x,y; h text height)
GPIO-1: Top Overlay "10" at 4165,1335 h77.5 r180; Top Overlay "1" at 4425,1250 h77.5 r180; Top Overlay "2" at 4425,1150 h77.5 r180
GPIO-2: Top Overlay "1" at 3625,1250 h77.5 r180; Top Overlay "2" at 3625,1150 h77.5 r180; Top Overlay "40" at 2615,1335 h77.5 r180
LCD_CON: Top Overlay "1" at 1525,4100 h77.5; Top Overlay "2" at 1525,4200 h77.5; Top Overlay "40" at 2535,4015 h77.5
RM1: tDocu "R1" at 2904.16,1797.62 h18.6; tDocu "R2" at 2904.16,1777.94 h18.6; tDocu "R3" at 2904.16,1758.25 h18.6; tDocu "R4" at 2904.16,1738.57 h18.6
RM2: tDocu "R1" at 3135.62,2245.84 h18.6 r270; tDocu "R2" at 3115.94,2245.84 h18.6 r270; tDocu "R3" at 3096.25,2245.84 h18.6 r270; tDocu "R4" at 3076.57,2245.84 h18.6 r270
RM3: tDocu "R1" at 3270.62,2293.84 h18.6 r270; tDocu "R2" at 3250.94,2293.84 h18.6 r270; tDocu "R3" at 3231.25,2293.84 h18.6 r270; tDocu "R4" at 3211.57,2293.84 h18.6 r270
RM4: tDocu "R1" at 2904.16,1902.62 h18.6; tDocu "R2" at 2904.16,1882.94 h18.6; tDocu "R3" at 2904.16,1863.25 h18.6; tDocu "R4" at 2904.16,1843.57 h18.6
RM5: tDocu "R1" at 3765.62,2632.84 h18.6 r270; tDocu "R2" at 3745.94,2632.84 h18.6 r270; tDocu "R3" at 3726.25,2632.84 h18.6 r270; tDocu "R4" at 3706.57,2632.84 h18.6 r270
RM6: tDocu "R1" at 3651.62,2404.84 h18.6 r270; tDocu "R2" at 3631.94,2404.84 h18.6 r270; tDocu "R3" at 3612.25,2404.84 h18.6 r270; tDocu "R4" at 3592.57,2404.84 h18.6 r270
RM7: tDocu "R1" at 3588.62,2518.84 h18.6 r270; tDocu "R2" at 3568.94,2518.84 h18.6 r270; tDocu "R3" at 3549.25,2518.84 h18.6 r270; tDocu "R4" at 3529.57,2518.84 h18.6 r270
RM8: tDocu "R1" at 3813.62,2404.84 h18.6 r270; tDocu "R2" at 3793.94,2404.84 h18.6 r270; tDocu "R3" at 3774.25,2404.84 h18.6 r270; tDocu "R4" at 3754.57,2404.84 h18.6 r270
RM9: tDocu "R1" at 3714.62,2533.84 h18.6 r270; tDocu "R2" at 3694.94,2533.84 h18.6 r270; tDocu "R3" at 3675.25,2533.84 h18.6 r270; tDocu "R4" at 3655.57,2533.84 h18.6 r270
RM10: tDocu "R1" at 3861.62,2755.84 h18.6 r270; tDocu "R2" at 3841.94,2755.84 h18.6 r270; tDocu "R3" at 3822.25,2755.84 h18.6 r270; tDocu "R4" at 3802.57,2755.84 h18.6 r270
RM12: tDocu "R1" at 4191.5,2250.5 h24.8; tDocu "R2" at 4191.5,2215.5 h24.8; tDocu "R3" at 4191.5,2185.5 h24.8; tDocu "R4" at 4191.5,2150.5 h24.8
RM16: tDocu "R1" at 4035.38,1734.16 h18.6 r90; tDocu "R2" at 4055.06,1734.16 h18.6 r90; tDocu "R3" at 4074.75,1734.16 h18.6 r90; tDocu "R4" at 4094.43,1734.16 h18.6 r90
U$9: Top Overlay "Pb" at 2003.07,2429.57 h124
U$12: Top Overlay "RoHS" at 1755,3717 h155; Top Overlay "Compliant" at 1755,3602 h108.5
UEXT: Top Overlay "10" at 4085,4015 h77.5; Top Overlay "1" at 3825,4100 h77.5; Top Overlay "2" at 3825,4200 h77.5
USB_HOST: Top Overlay "E L E C T R O N I C S" at 1264.68,3285 h24.8 r270; Top Overlay "+" at 1495,3305 h77.5 r180; Top Overlay "-" at 1495,2965 h77.5 r90; Top Overlay "D+" at 1505,3025 h62 r180; Top Overlay "D-" at 1505,3205 h62 r180
USB_OTG: Top Overlay "VBUS" at 1229.92,2620 h31; Top Overlay "D-" at 1184.92,2560 h31; Top Overlay "D+" at 1184.92,2530 h31; Top Overlay "ID" at 1184.92,2500 h31; Top Overlay "GND" at 1284.92,2460 h31 r180; Top Overlay "USB" at 1100,2480 h77.5 r90
VGA_DB15-F: Top Overlay "1" at 4551.52,3505.75 h77.5 r90; Top Overlay "5" at 4555.46,3017.76 h77.5 r90; Top Overlay "6" at 4656.24,3549.06 h77.5 r90; Top Overlay "10" at 4660.18,3009.88 h77.5 r90; Top Overlay "15" at 4774.35,2982.13 h77.5 r90; Top Overlay "11" at 4762.54,3525.43 h77.5 r90; Top Overlay "Female" at 5031,3385 h77.5 r90; tDocu "HDF15 CONEC" at 5213.41,3051.26 h77.5 r90